# Altium PCB PCB.PcbDoc
Units mil, origin at the board's own origin, x right, y up, seen from the top; angles counter-clockwise.
Board outline 3100 x 3535 mil, 4 copper layers (Signal1, GND1, GND2, Signal2), stack 23.756 mil thick; 77 components, 60 nets, 305 pads, 56 vias.
Unrouted connection lines stored in the file: 225.
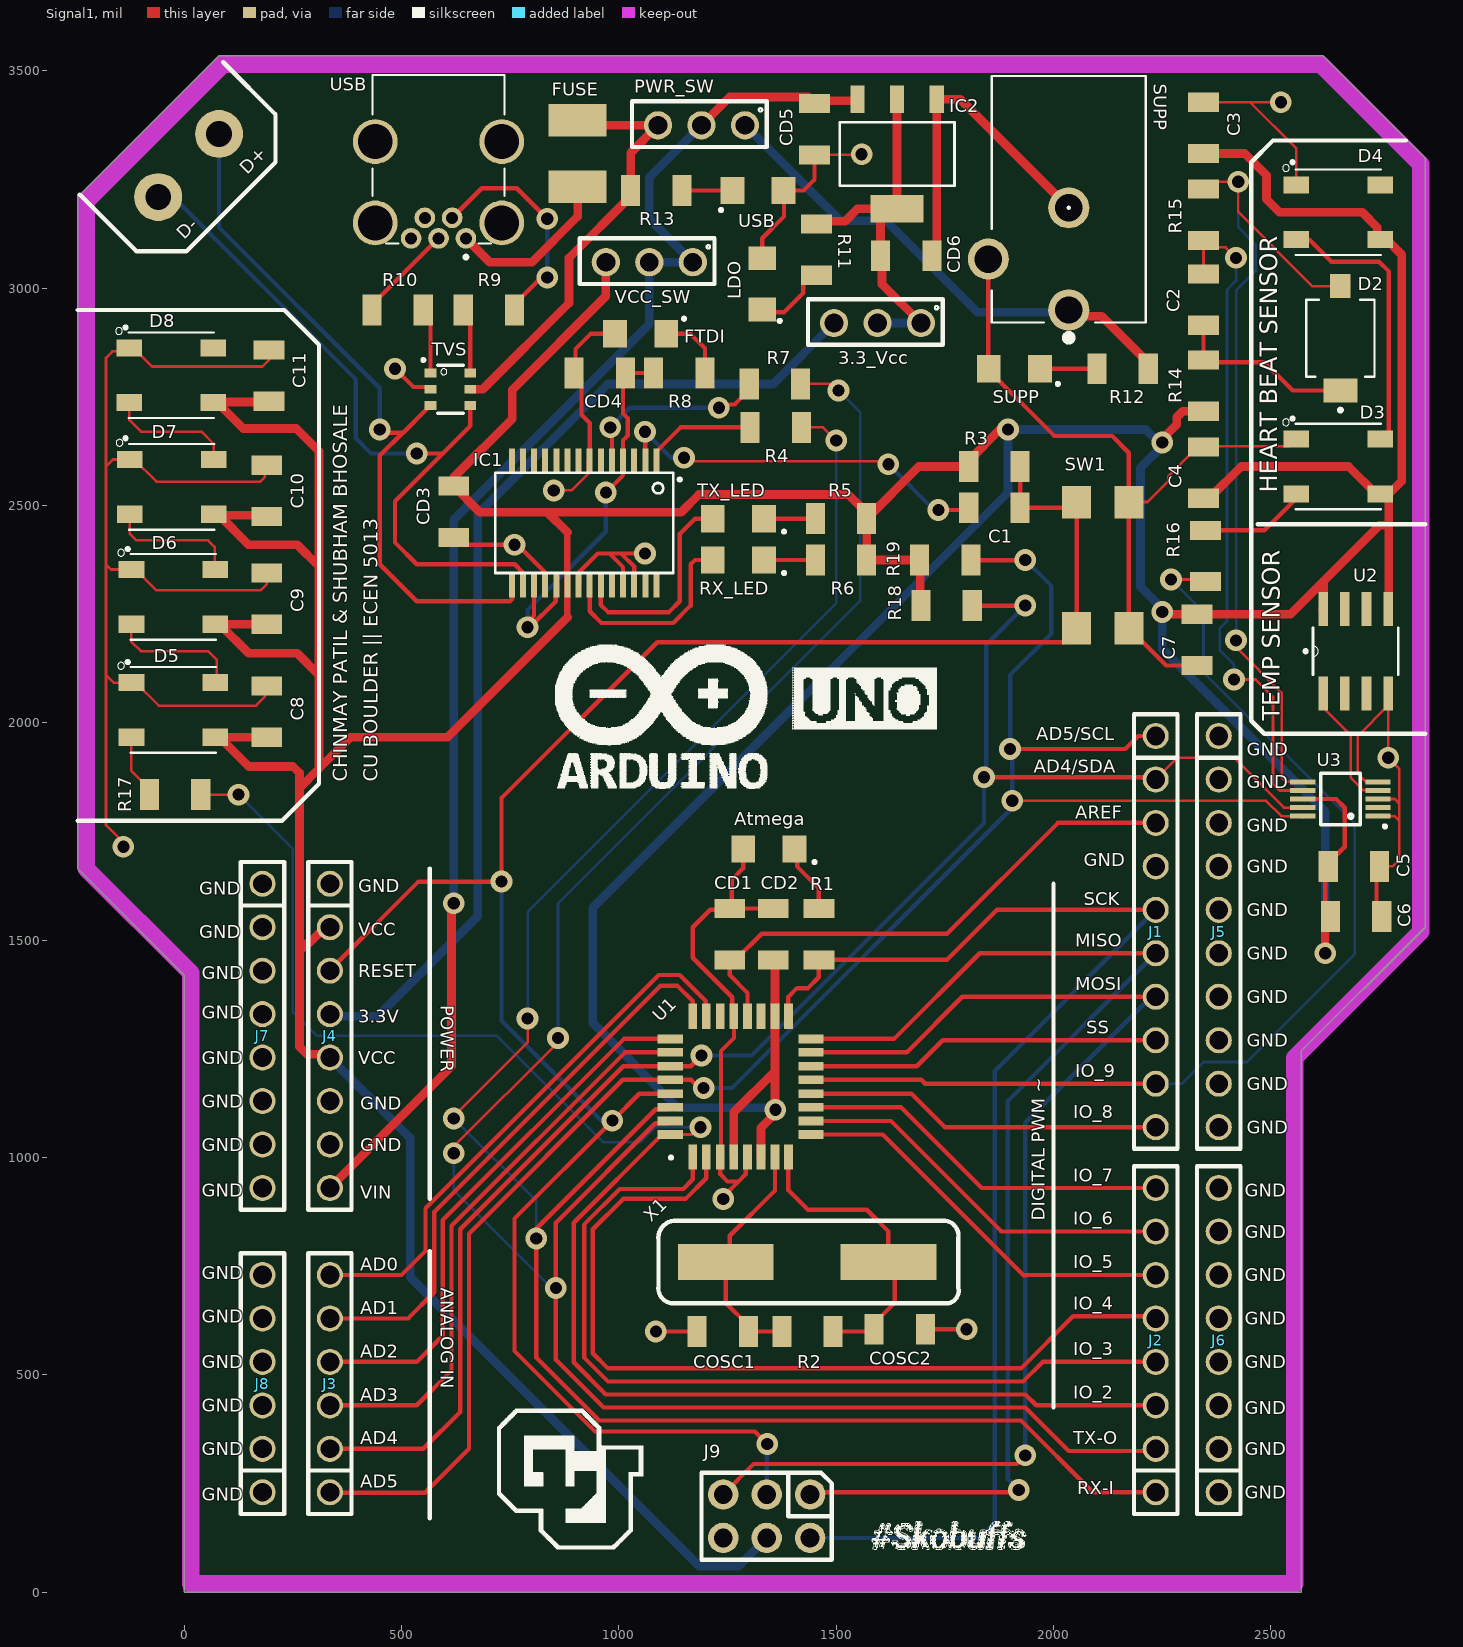
[diagram p0: Signal1 view]
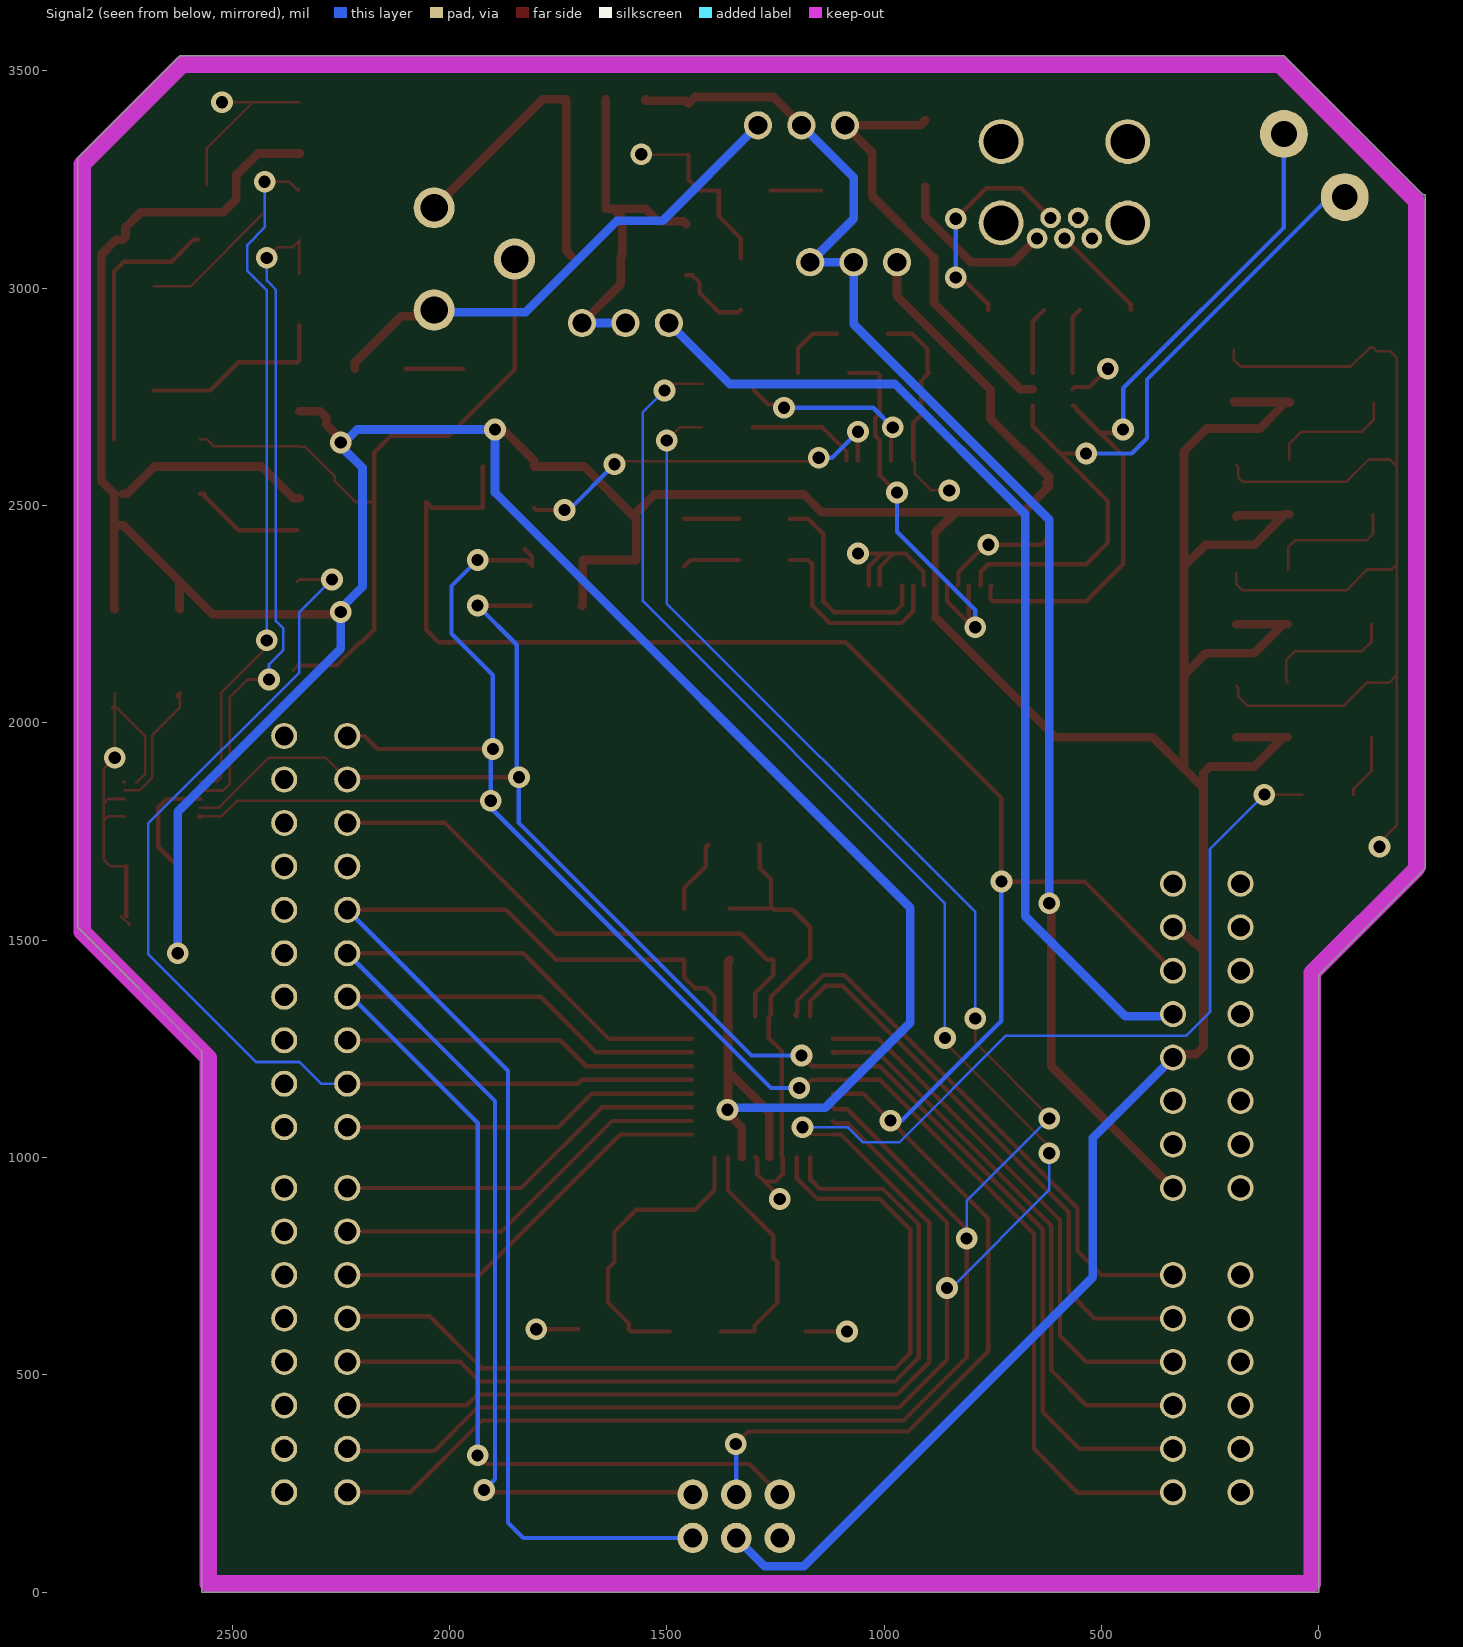
[diagram p1: Signal2 view, seen from below]
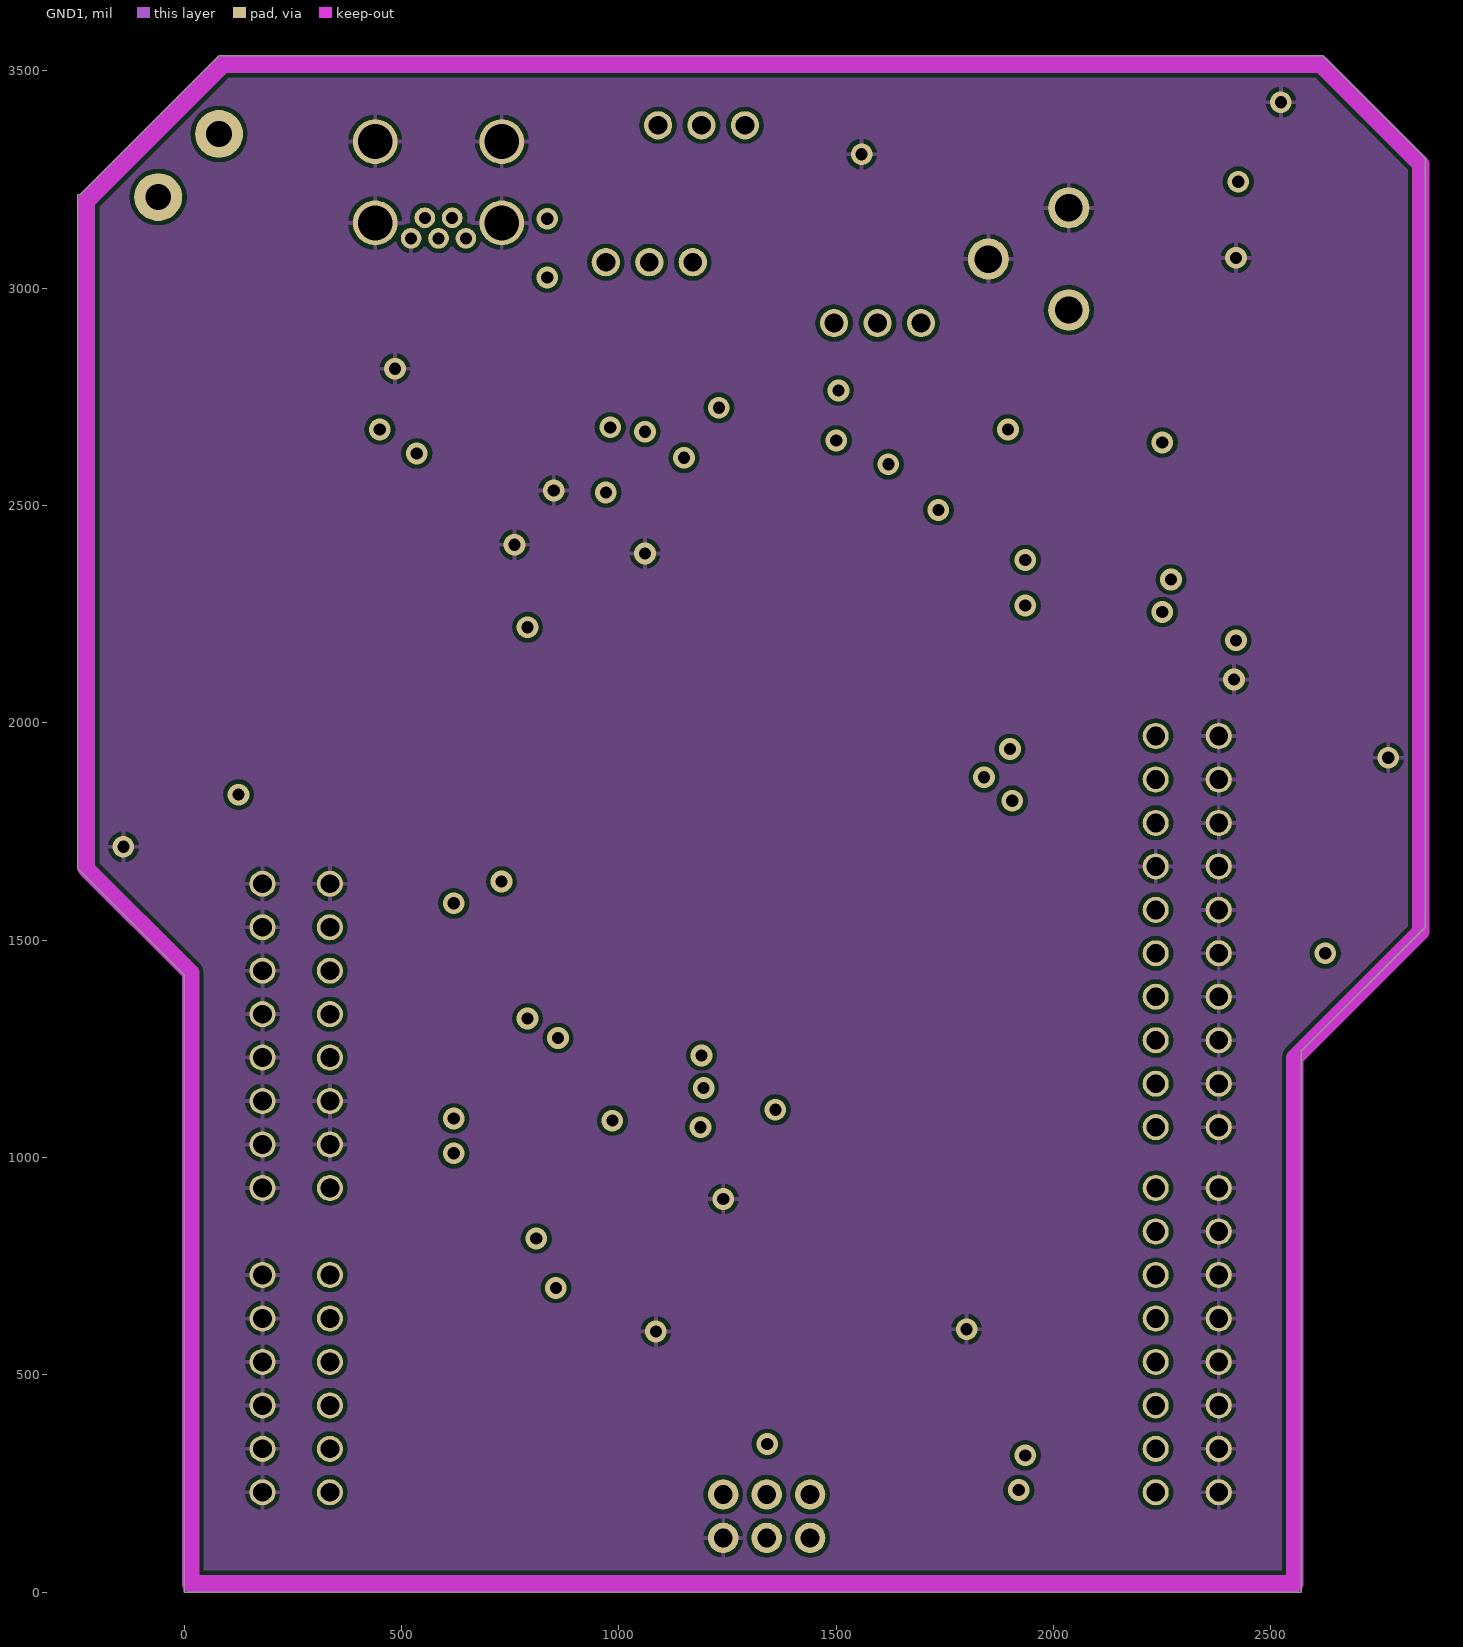
[diagram p2: GND1]
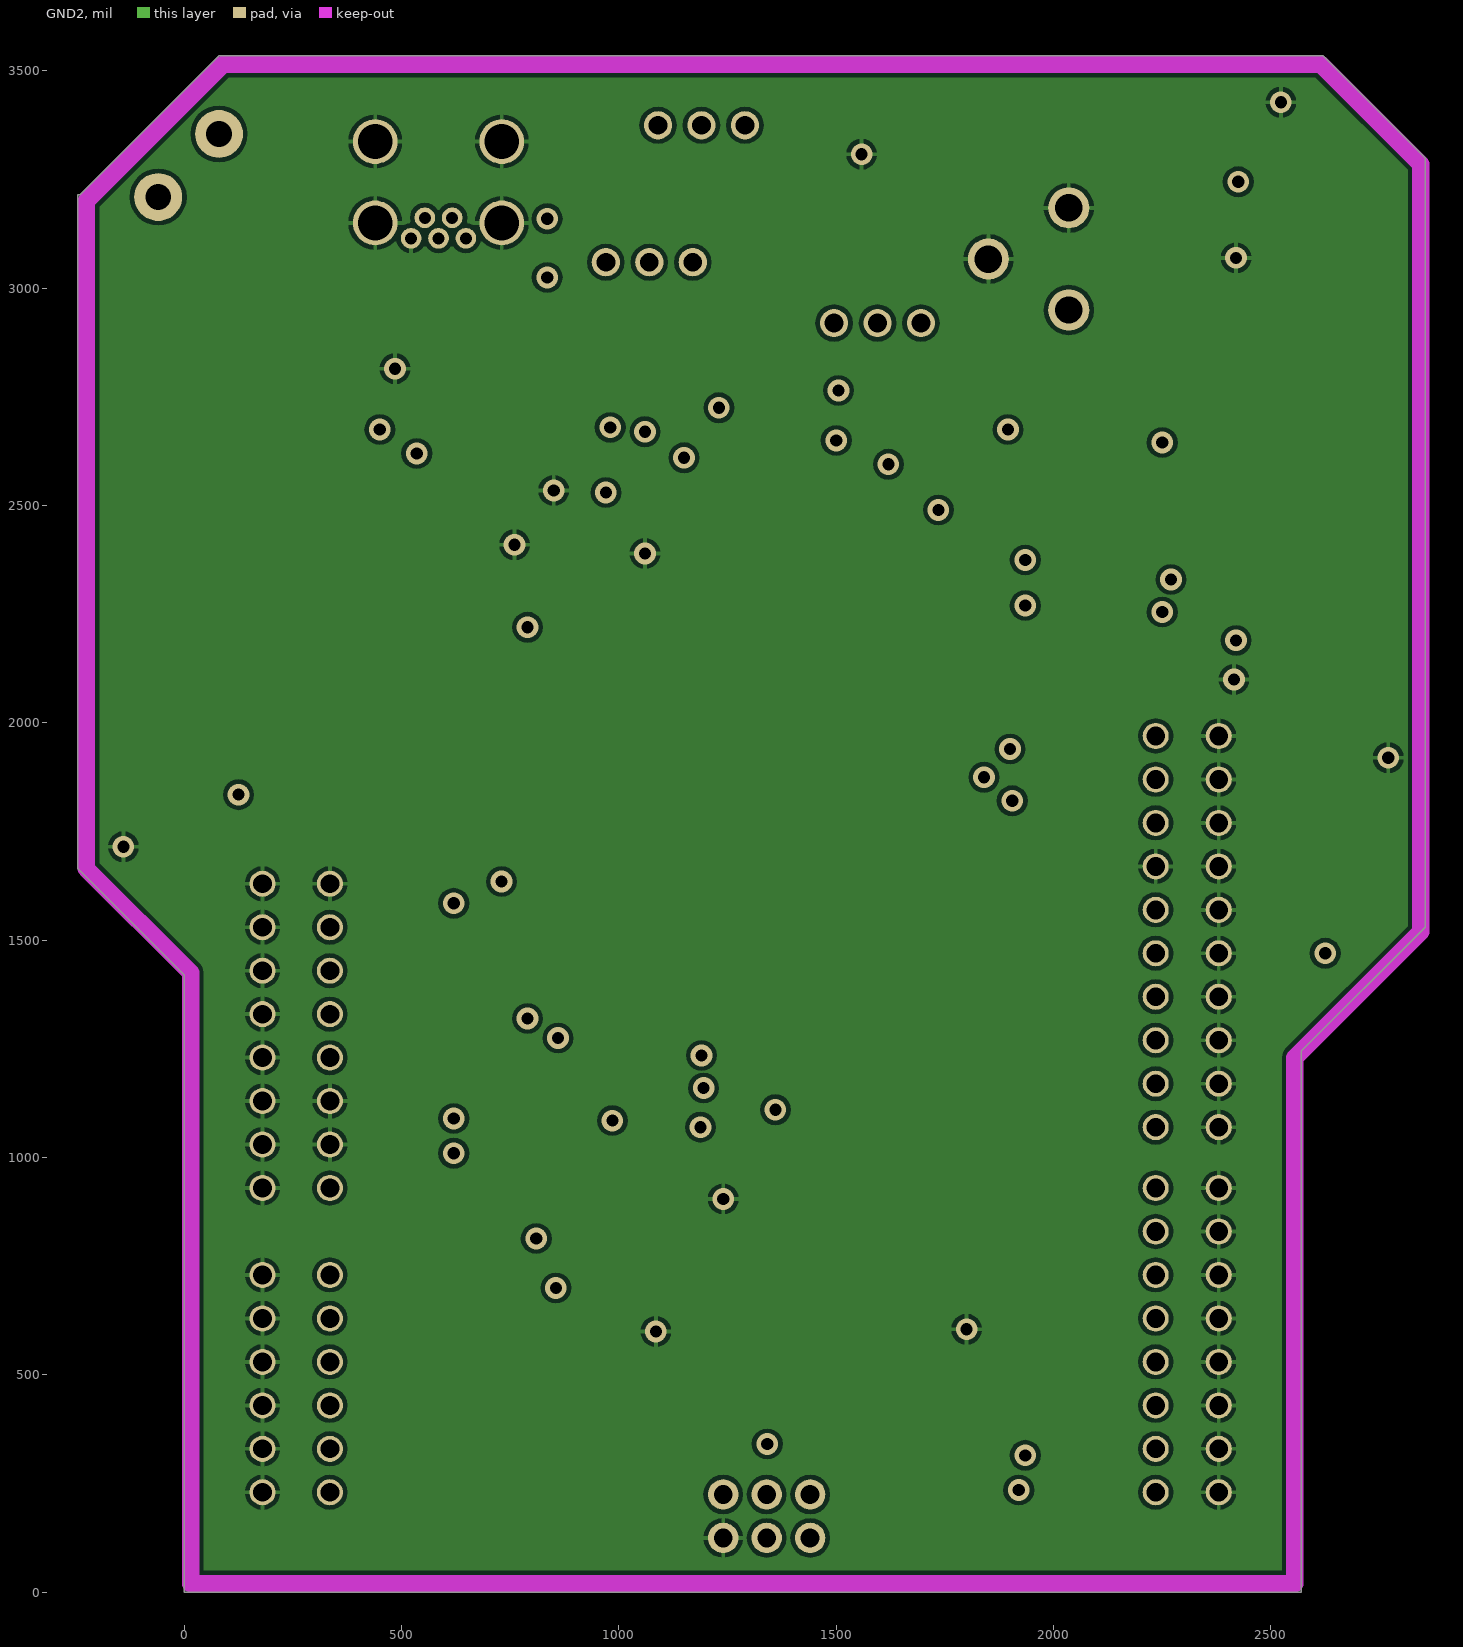
[diagram p3: GND2]

## Layer stack, top to bottom
Top Solder: solder mask 0.4, Solder Resist, Dk 3.5
Signal1: signal copper 1.4
Dielectric 2: prepreg 2.8, PP-006, Dk 4.1
GND1: signal copper 1.3778
Dielectric 1: dielectric 12.6, FR-4, Dk 4.8
GND2: signal copper 1.3778
Dielectric 3: prepreg 2.8, PP-006, Dk 4.1
Signal2: signal copper 1.4
Bottom Solder: solder mask 0.4, Solder Resist, Dk 3.5

## Board outline
0,0 2570,0 2570,1245 2855,1530 2855,3300 2620,3535 80,3535 -240,3215 -245,3215 -245,1665 0,1420

## Design rules (kind name [scope] priority, off if disabled: settings)
Clearance [All] p1: gap=10 ignorepadtopadclearanceinfootprint=FALSE except(0: Arc-Hole Track-Hole SMDPad-Hole THPad-Hole Via-Hole Fill-Hole Poly-Hole Region-Hole Text-Hole)
PolygonConnect [All] p1: connectstyle=Relief reliefconductorwidth=10 reliefentries=4 polygonreliefangle="90 Angle" airgapwidth=10
RoutingVias [All] p1: holewidth=28 width=50 viastyle="Through Hole" minholewidth=28 minwidth=50 maxholewidth=28 maxwidth=50
SilkToSilkClearance [All] p1: silktosilkclearance=6
SilkToSolderMaskClearance [IsPad] p1: minsilkscreentomaskgap=6 clearancetoexposedcopper=TRUE
SolderMaskExpansion [All] p1: expansion=4
Width "Schematic Width Constraint_12" [InNet('Diode_Out_2')] p1: maxlimit=10 minlimit=6 preferedwidth=6
Width "Schematic Width Constraint_11" [InNet('AD5/SCL')] p2: maxlimit=10 minlimit=6 preferedwidth=6
Width "Schematic Width Constraint_10" [InNet('AD4/SDA')] p3: maxlimit=10 minlimit=6 preferedwidth=6
Width "Schematic Width Constraint_8" [InNet('Diode_Out_1')] p4: maxlimit=10 minlimit=6 preferedwidth=6
Width "Schematic Width Constraint_7" [InNet('Temp_Vout_1')] p5: maxlimit=6 minlimit=6 preferedwidth=6
Width "Schematic Width Constraint_6" [InNet('VCC')] p6: maxlimit=20 minlimit=10 preferedwidth=20
Width "Schematic Width Constraint_5" [InNet('3.3V_VCC')] p7: maxlimit=20 minlimit=10 preferedwidth=20
Width "Schematic Width Constraint_4" [InNet('3.3V')] p8: maxlimit=20 minlimit=10 preferedwidth=20
Width "Schematic Width Constraint_3" [InNet('SUPP')] p9: maxlimit=20 minlimit=10 preferedwidth=20
Width "Schematic Width Constraint_2" [InNet('VIN')] p10: maxlimit=20 minlimit=10 preferedwidth=20
Width "Schematic Width Constraint_1" [InNet('USB_VCC')] p11: maxlimit=20 minlimit=10 preferedwidth=20
Width "Schematic Width Constraint" [InNet('USB_SUPP')] p12: maxlimit=20 minlimit=10 preferedwidth=20
Width [All] p13: maxlimit=20 minlimit=6 preferedwidth=6
28 further rules are at their usual default settings.

## Classes and differential pairs
component class Sensors: C2 C3 C4 C5 C6 C7 C8 C9 C10 C11 D2 D3 D4 D5 D6 D7 D8 R14 R15 R16 R17 U2 U3
component class PowerSupply: 3.3_Vcc CD5 CD6 FUSE IC2 LDO PWR_SW R9 R10 R11 R12 R13 SUPP TVS USB VCC_SW
component class FTDIChip: C1 CD3 CD4 D+ D- FTDI IC1 R4 R5 R6 R7 R8 RX_LED TX_LED
component class Atmega328: Atmega CD1 CD2 COSC1 COSC2 J1 J2 J3 J4 J5 J6 J7 J8 J9 R1 R2 R3 R18 R19 SW1 U1 X1

## Components (designator, comment, footprint, x,y, rotation, side; value= is the part's Value field where it differs from the comment)
3.3_Vcc "PREC003SAAN-RC" 3_PIN 1695,2919.95 r180 top value="CONN HEADER VERT 3POS 2.54MM" (schematic designator 3)
Atmega "LTST-C150CKT" LED 1345,1710 r90 top value="LED RED CLEAR 1206 SMD" (schematic designator D1)
C1 "CL31A226MOCLNNC" 1206_Passive 1804,2495 r0 top value="CAP CER 22UF 16V X5R 1206"
C2 "CL31A226MOCLNNC" 1206_Passive 2345,2914 r90 top value="CAP CER 22UF 16V X5R 1206"
C3 "CL31A226MOCLNNC" 1206_Passive 2345,3429 r270 top value="CAP CER 22UF 16V X5R 1206"
C4 "CL31A226MOCLNNC" 1206_Passive 2345,2636 r270 top value="CAP CER 22UF 16V X5R 1206"
C5 "CL31A226MOCLNNC" 1206_Passive 2751,1670 r180 top value="CAP CER 22UF 16V X5R 1206"
C6 "CL31A226MOCLNNC" 1206_Passive 2756,1555 r180 top value="CAP CER 22UF 16V X5R 1206"
C7 "CL31A226MOCLNNC" 1206_Passive 2330,2131 r90 top value="CAP CER 22UF 16V X5R 1206"
C8 "CL31A226MOCLNNC" 1206_Passive 190,2086 r270 top value="CAP CER 22UF 16V X5R 1206"
C9 "CL31A226MOCLNNC" 1206_Passive 190,2346 r270 top value="CAP CER 22UF 16V X5R 1206"
C10 "CL31A226MOCLNNC" 1206_Passive 190,2594 r270 top value="CAP CER 22UF 16V X5R 1206"
C11 "CL31A226MOCLNNC" 1206_Passive 195,2859 r270 top value="CAP CER 22UF 16V X5R 1206"
CD1 "22uF" 1206_Passive 1255,1574 r270 top value="CAP CER 22UF 16V X5R 1206"
CD2 "22uF" 1206_Passive 1355,1454 r90 top value="CAP CER 22UF 16V X5R 1206"
CD3 "22uF" 1206_Passive 620,2546 r270 top value="CAP CER 22UF 16V X5R 1206"
CD4 "22uF" 1206_Passive 1016,2805 r180 top value="CAP CER 22UF 16V X5R 1206"
CD5 "22uF" 1206_Passive 1450,3426 r270 top value="CAP CER 22UF 16V X5R 1206"
CD6 "22uF" 1206_Passive 1601,3075 r0 top value="CAP CER 22UF 16V X5R 1206"
COSC1 "22pF" 1206_Passive 1179,600 r0 top value="CAP CER 22PF 16V C0G/NP0 1206"
COSC2 "22pF" 1206_Passive 1706,605 r180 top value="CAP CER 22PF 16V C0G/NP0 1206"
D2 "SFH_2430-Z" *DIO_SFH_2430-Z_SFH_2430-Z(Primary) 2660,2885 r90 top
D3 "IN-PI554FCH" *LED_IN-PI554FCH 2655,2590 r0 top
D4 "IN-PI554FCH" *LED_IN-PI554FCH 2655,3175 r0 top
D5 "IN-PI554FCH" *LED_IN-PI554FCH -25,2030 r0 top
D6 "IN-PI554FCH" *LED_IN-PI554FCH -25,2290 r0 top
D7 "IN-PI554FCH" *LED_IN-PI554FCH -28.54,2542.99 r0 top
D8 "IN-PI554FCH" *LED_IN-PI554FCH -30,2800 r0 top
D+ "TESTPOINT" TestPoint 80,3355 r0 top
D- "TESTPOINT" TestPoint -60,3210 r0 top
FTDI "LTST-C150CKT" LED 1050,2895 r90 top value="LED RED CLEAR 1206 SMD" (schematic designator FTDI1)
FUSE "MF-MSMF050-2" FUSE 895,3385 r270 top value="PTC RESET FUSE 15V 500MA 1812" (schematic designator FUSE1)
IC1 "FT232RL-REEL" FTDI 910,2450 r270 top value="IC USB FS SERIAL UART 28-SSOP"
IC2 "AZ1117CH-3.3TRG1" LDO 1640,3310 r0 top value="IC REG LINEAR 3.3V 800MA SOT223"
J1 "PPTC101LFBN-RC" 10_PIN 2235,1067.24 r90 top value="CONN HDR 10POS 0.1 TIN PCB"
J2 "PPTC081LFBN-RC" 8_PIN 2235,930 r270 top value="CONN HDR 8POS 0.1 TIN PCB"
J3 "PPTC061LFBN-RC" 6_PIN 335,232.37 r90 top value="CONN HDR 6POS 0.1 TIN PCB"
J4 "PPTC081LFBN-RC" 8_PIN 335,930 r90 top value="CONN HDR 8POS 0.1 TIN PCB"
J5 "PPTC101LFBN-RC" 10_PIN 2380,1067.24 r90 top value="CONN HDR 10POS 0.1 TIN PCB"
J6 "PPTC081LFBN-RC" 8_PIN 2380,930 r270 top value="CONN HDR 8POS 0.1 TIN PCB"
J7 "PPTC081LFBN-RC" 8_PIN 180,930 r90 top value="CONN HDR 8POS 0.1 TIN PCB"
J8 "PPTC061LFBN-RC" 6_PIN 180,232.37 r90 top value="CONN HDR 6POS 0.1 TIN PCB"
J9 "ICSP" ICSP 1440,225 r270 top value=NRPN032PAEN-RC
LDO "LTST-C150CKT" LED 1330,3010 r0 top value="LED RED CLEAR 1206 SMD" (schematic designator 1)
PWR_SW "PREC003SAAN-RC" 3_PIN 1290,3374.95 r180 top value="CONN HEADER VERT 3POS 2.54MM" (schematic designator PWR_SW1)
R1 "RNCP1206FTD1K00" 1206_Passive 1460,1574 r270 top value="RES 1K OHM 1% 1/2W 1206"
R2 "1M" 1206_Passive 1494,600 r180 top value="RES 1M OHM 5% 1/4W 1206"
R3 "RNCP1206FTD1K00" 1206_Passive 1804,2590 r0 top value="RES 1K OHM 1% 1/2W 1206"
R4 "RNCP1206FTD1K00" 1206_Passive 1301,2680 r0 top value="RES 1K OHM 1% 1/2W 1206"
R5 "RNCP1206FTD1K00" 1206_Passive 1571,2470 r180 top value="RES 1K OHM 1% 1/2W 1206"
R6 "RNCP1206FTD1K00" 1206_Passive 1571,2375 r180 top value="RES 1K OHM 1% 1/2W 1206"
R7 "RNCP1206FTD1K00" 1206_Passive 1299,2780 r0 top value="RES 1K OHM 1% 1/2W 1206"
R8 "RNCP1206FTD1K00" 1206_Passive 1079,2805 r0 top value="RES 1K OHM 1% 1/2W 1206"
R9 "RMCF1206JT300R‎" 1206_Passive 761,2950 r180 top value=300Ohm
R10 "RMCF1206JT300R‎" 1206_Passive 551,2950 r180 top value=300Ohm
R11 "RNCP1206FTD1K00" 1206_Passive 1455,3029 r90 top value="RES 1K OHM 1% 1/2W 1206"
R12 "RNCP1206FTD1K00" 1206_Passive 2219,2815 r180 top value="RES 1K OHM 1% 1/2W 1206"
R13 "RNCP1206FTD1K00" 1206_Passive 1026,3225 r0 top value="RES 1K OHM 1% 1/2W 1206"
R14 "RNCP1206FTD1K00" 1206_Passive 2345,2836 r270 top value="RES 1K OHM 1% 1/2W 1206"
R15 "RMCF1206JT1M00" 1206_Passive 2345,3229 r270 top value="RES 1M OHM 5% 1/4W 1206"
R16 "RNCP1206FTD1K00" 1206_Passive 2350,2324 r90 top value="RES 1K OHM 1% 1/2W 1206"
R17 "RNCP1206FTD1K00" 1206_Passive -81,1835 r0 top value="RES 1K OHM 1% 1/2W 1206"
R18 "RNCP1206FTD1K00" 1206_Passive 1814,2270 r180 top value="RES 1K OHM 1% 1/2W 1206"
R19 "RNCP1206FTD1K00" 1206_Passive 1811,2375 r180 top value="RES 1K OHM 1% 1/2W 1206"
RX_LED "LTST-C150CKT" LED 1275,2375 r90 top value="LED RED CLEAR 1206 SMD" (schematic designator RX_LED1)
SUPP "Power Jack" Power_Jack 2035,2950 r90 top value="CONN PWR JACK 2X5.5MM SOLDER" (schematic designator SUPP1)
SUPP "LTST-C150CKT" LED 1910,2815 r90 top value="LED RED CLEAR 1206 SMD" (schematic designator 2)
SW1 "RESET SWITCH" Switch 2115,2365 r0 top value="SWITCH TACTILE SPST-NO 50MA 12V"
TVS "IP4234CZ6,125" TVS 610,2765 r90 top value="TVS DIODE 5.5V 6TSOP" (schematic designator TVS1)
TX_LED "LTST-C150CKT" LED 1275,2470 r90 top value="LED RED CLEAR 1206 SMD" (schematic designator TX_LED1)
U1 "ATMEGA328P-ANR" ATMega328P 1280,1165 r270 top value="IC MCU 8BIT 32KB FLASH 32TQFP"
U2 "TMP36GSZ" *SOIC127P600X175-8N 2695,2165 r90 top
U3 "ADS1115IDGSR" *SOP50P490X110-10N 2660,1825 r180 top
USB "LTST-C150CKT" LED 1320,3225 r270 top value="LED RED CLEAR 1206 SMD" (schematic designator USB_SUPP1)
USB "XM7D-0512" USB 730.67,3342.44 r270 top value="CONN RCPT USB2.0 MINI B 5P R/A" (schematic designator USB1)
VCC_SW "PREC003SAAN-RC" 3_PIN 1170,3059.95 r180 top value="CONN HEADER VERT 3POS 2.54MM" (schematic designator VCC_SW1)
X1 "ABLS-16.000MHZ-B4-T" Crystal 1245.98,760 r0 top value="CRYSTAL 16.0000MHZ 18PF SMD"

## Footprints (in the part's own frame and the unit in brackets; to place one, negate y for a bottom-side part, rotate by r counter-clockwise, add the part's x,y. Pads: shape width x height; smd on the part's side, far side on the other; paste and mask are expansions set on the pad)
3_PIN [mm]
  round 1.65 hole 1.1: 1(0,-0.001) 2(2.54,-0.001) 3(5.08,-0.001)
  silkscreen extent -1.27,-1.4 6.6,1.27
6_PIN [mil]
  round 60 hole 43.31: 1(-2.37,0) 2(97.63,0) 3(197.63,0) 4(297.63,0) 5(397.63,0) 6(497.63,0)
  silkscreen extent -52,-50 548,50
8_PIN [mil]
  round 60 hole 43.31: 1(700,0) 2(600,0) 3(500,0) 4(400,0) 5(300,0) 6(200,0) 7(100,0) 8(0,0)
  silkscreen extent -50,-50 750,50
10_PIN [mil]
  round 60 hole 43.31: 1(902.76,0) 2(802.76,0) 3(702.76,0) 4(602.76,0) 5(502.76,0) 6(402.76,0) 7(302.76,0) 8(202.76,0) 9(102.76,0) 10(2.76,0)
  silkscreen extent -47,-50 953,50
1206_Passive [mil]
  rect 44x71 smd: 1(1,0) 2(119,0)
*DIO_SFH_2430-Z_SFH_2430-Z(Primary) [mm]
  rect 1.4x1.2 smd: A(3.05,0)
  rect 1.4x2 smd: C(-3.05,0)
  silkscreen extent -4.3,-2 2.25,2
*LED_IN-PI554FCH [mm]
  rect 1.5x1 smd: 1(-2.45,1.6) 2(-2.45,-1.6) 3(2.45,-1.6) 4(2.45,1.6)
  silkscreen extent -3.25,-2.5 2.5,2.78
*SOIC127P600X175-8N [mil]
  rect 78x22 smd: 1(-97,75) 2(-97,25) 3(-97,-25) 4(-97,-75) 5(97,-75) 6(97,-25) 7(97,25) 8(97,75)
  silkscreen extent -54,-98 54,98
*SOP50P490X110-10N [mm]
  rect 1.45x0.3 smd: 1(-2.2,1)
  rect 1.47x0.3 smd: 2(-2.2,0.5) 3(-2.2,0) 4(-2.2,-0.5) 5(-2.2,-1) 6(2.2,-1) 7(2.2,-0.5) 8(2.2,0) 9(2.2,0.5) 10(2.2,1)
  silkscreen extent -2.68,-1.5 1.15,1.68
ATMega328P [mil]
  rect 58x20 smd: 1(163.93,-110) 2(163.93,-79) 3(163.93,-47) 4(163.93,-16) 5(163.93,16) 6(163.93,47) 7(163.93,79) 8(163.93,110) 17(-160.07,110) 18(-160.07,79) 19(-160.07,47) 20(-160.07,16) 21(-160.07,-16) 22(-160.07,-47) 23(-160.07,-79) 24(-160.07,-110)
  rect 20x58 smd: 9(111.93,162) 10(80.93,162) 11(48.93,162) 12(17.93,162) 13(-14.07,162) 14(-45.07,162) 15(-77.07,162) 16(-108.07,162) 25(-108.07,-162) 26(-77.07,-162) 27(-45.07,-162) 28(-14.07,-162) 29(17.93,-162) 30(48.93,-162) 31(80.93,-162) 32(111.93,-162)
Crystal [mm]
  rect 5.6x2.1 smd: 1(0,0) 2(9.5,0)
  silkscreen extent -3.95,-2.41 13.6,2.41
FTDI [mil]
  rect 55x13.7 smd: 1(-153.94,176.34) 2(-153.94,150.75) 3(-153.94,125.16) 4(-153.94,99.57) 5(-153.94,73.98) 6(-153.94,48.39) 7(-153.94,22.8) 8(-153.94,-2.8) 9(-153.94,-28.39) 10(-153.94,-53.98) 11(-153.94,-79.57) 12(-153.94,-105.16) 13(-153.94,-130.75) 14(-153.94,-156.34) 15(133.94,-156.34) 16(133.94,-130.75) 17(133.94,-105.16) 18(133.94,-79.57) 19(133.94,-53.98) 20(133.94,-28.39) 21(133.94,-2.8) 22(133.94,22.8) 23(133.94,48.39) 24(133.94,73.98) 25(133.94,99.57) 26(133.94,125.16) 27(133.94,150.75) 28(133.94,176.34)
  silkscreen extent -125,-195 105,215
FUSE [mm]
  rect 1.9x3.4 smd: 1(3.855,0.254) 2(-0.045,0.254)
ICSP [mil]
  round 70 hole 43.31: 1(0,0) 2(100,0) 3(0,-100) 4(100,-100) 5(0,-200) 6(100,-200)
  silkscreen extent -50,-250 150,50
LDO [mil]
  rect 33x63 smd: 1(91,124.94) 2(0,124.94) 3(-91,124.94)
  rect 122x63 smd: 4(0,-127.06)
  silkscreen extent -132,-74 132,72
LED [mil]
  rect 63x55 smd: 1(0,59) 2(0,-59)
Power_Jack [mm]
  round 2.4 hole 1.6: 1(0,0) 2(5.969,0) 3(2.977,4.7)
  silkscreen extent -1.82,-4.5 13.68,4.5
Switch [mm]
  rect 1.7x1.9 smd: 1(1.479,-3.727) 2(1.479,3.639) 3(-1.569,-3.727) 4(-1.569,3.639)
TestPoint [mm]
  round 2.8 hole 1.5: 1(0,0)
TVS [mm]
  rect 0.508x0.7 smd: 1(1.02,1.105) 2(0.07,1.105) 3(-0.88,1.105) 4(-0.88,-1.219) 5(0.07,-1.219) 6(1.02,-1.219)
  silkscreen extent -1.33,-0.81 1.47,0.69
USB [mm]
  round 1.208 hole 0.7: 1(5.777,-2.1) 2(4.577,-2.9) 3(5.777,-3.7) 4(4.577,-4.5) 5(5.777,-5.3)
  round 2.616 hole 2.032: SH1(0.127,-7.4) SH2(4.877,-7.4) SH3(4.877,0) SH4(0.127,0)
  silkscreen extent -3.77,-7.55 6.98,0.15

## Part data
3.3_Vcc PWR_SW VCC_SW: library part 3_PIN, "Connector Header Through Hole 3 position 0.100\" (2.54mm)", Digikey Link=https://www.digikey.com/product-detail/en/PREC003SAAN-RC/S1012EC-03-ND/2774851/?itemSeq=304982371, Digikey Part=S1012EC-03-ND
Atmega FTDI LDO RX_LED SUPP TX_LED USB: library part 1206_RED_LED, "Red 638nm LED Indication - Discrete 1.8V 1206 (3216 Metric)", Digikey Link=https://www.digikey.com/product-detail/en/LTST-C150CKT/160-1167-1-ND/269239/?itemSeq=304982368, Digikey Part=160-1167-1-ND
C1 C2 C3 C4 C5 C6 C7 C8 C9 C10 C11 CD1 CD2 CD3 CD4 CD5 CD6: library part 1206_22uF, "22µF ±20% 16V Ceramic Capacitor X5R 1206 (3216 Metric)", Digikey Link=https://www.digikey.com/product-detail/en/CL31A226MOCLNNC/1276-2728-1-ND/3890814/?itemSeq=304982363, Digikey Part=1276-2728-1-ND
COSC1 COSC2: library part 1206_22pF, "22pF ±5% 16V Ceramic Capacitor C0G, NP0 1206 (3216 Metric)", Digikey Link=https://www.digikey.com/product-detail/en/885012008011/732-7867-1-ND/5454494/?itemSeq=304982362, Digikey Part=732-7867-1-ND
D2: "PHOTODIODE 570NM SMD", Package="SMD-2 Osram Opto", Availability=Unavailable, MF="OSRAM Opto", MP="SFH 2430-Z", Price=None, SnapEDA_Link=https://www.snapeda.com/parts/SFH%202430-Z/OSRAM%20Opto%20Semiconductors%20Inc./view-part/?ref=snap
D3 D4 D5 D6 D7 D8: "5050RGB with integrated IC built in 4 PIN Viewing angle: 120 degrees", Package="SMD-4 Innolux", Availability=Unavailable, MF=Inolux, MP=IN-PI554FCH, Price=None, SnapEDA_Link=https://www.snapeda.com/parts/IN-PI554FCH/Inolux/view-part/?ref=snap
FUSE: library part Fuse, "Polymeric PTC Resettable Fuse 15V 500mA Ih Surface Mount 1812 (4532 Metric), Concave", Digikey Link=https://www.digikey.com/product-detail/en/MF-MSMF050-2/MF-MSMF050-2CT-ND/662842/?itemSeq=304982360, Digikey Part=MF-MSMF050-2CT-ND
IC1: library part FTDI, "USB Bridge, USB to UART USB 2.0 UART Interface 28-SSOP", Digikey Link=https://www.digikey.com/product-detail/en/FT232RL-REEL/768-1007-1-ND/1836402/?itemSeq=304982359, Digikey Part=768-1007-1-ND
IC2: library part 3.3V_LDO, "Linear Voltage Regulator IC Positive Fixed 1 Output 1A SOT-223", Digikey Link=https://www.digikey.com/product-detail/en/AZ1117CH-3.3TRG1/AZ1117CH-3.3TRG1DICT-ND/4505206/?itemSeq=304982370, Digikey Part=AZ1117CH-3.3TRG1DICT-ND
J1 J5: library part 10_PIN_FEMALE, "10 Position Header Connector 0.100\" (2.54mm) Through Hole Tin", Digikey Link=https://www.digikey.com/product-detail/en/PPTC101LFBN-RC/S7008-ND/810149/?itemSeq=304982352, Digikey Part=S7008-ND
J2 J4 J6 J7: library part 8_PIN_FEMALE, "8 Position Header Connector 0.100\" (2.54mm) Through Hole Tin", Digikey Link=https://www.digikey.com/product-detail/en/PPTC081LFBN-RC/S7006-ND/810147/?itemSeq=304982354, Digikey Part=S7006-ND
J3 J8: library part 6_PIN_FEMALE, "6 Position Header Connector 0.100\" (2.54mm) Through Hole Tin", Digikey Link=https://www.digikey.com/product-detail/en/PPTC061LFBN-RC/S7004-ND/810145/?itemSeq=304982353, Digikey Part=S7004-ND
J9: "Connector Header Through Hole 6 position 0.079\" (2.00mm)", Digikey Link=https://www.digikey.com/product-detail/en/NRPN032PAEN-RC/S5801-03-ND/804955/?itemSeq=304982355, Digikey Part=S5801-03-ND
R1 R3 R4 R5 R6 R7 R8 R11 R12 R13 R14 R16 R17 R18 R19: library part 1206_1K, "1 kOhms ±1% 0.5W, 1/2W Chip Resistor 1206 (3216 Metric) Anti-Sulfur, Moisture Resistant Thin Film", Digikey Link=https://www.digikey.com/product-detail/en/RNCP1206FTD1K00/RNCP1206FTD1K00CT-ND/2240675/?itemSeq=304982373, Digikey Part=RNCP1206FTD1K00CT-ND
R2 R15: library part 1206_1M, "1 MOhms ±5% 0.25W, 1/4W Chip Resistor 1206 (3216 Metric) Automotive AEC-Q200 Thick Film", Digikey Link=https://www.digikey.com/product-detail/en/RMCF1206JT1M00/RMCF1206JT1M00CT-ND/1942830/?itemSeq=304982358, Digikey Part="Number RMCF1206JT1M00CT-ND"
R9 R10: library part 1206_300Ohm, "300 Ohms ±5% 0.25W, 1/4W Chip Resistor 1206 (3216 Metric) Automotive AEC-Q200 Thick Film", Digikey Link=https://www.digikey.com/product-detail/en/RMCF1206JT300R/RMCF1206JT300RCT-ND/1942776/?itemSeq=304982374, Digikey Part=RMCF1206JT300RCT-ND
SUPP: "Power Barrel Connector Jack 2.10mm ID (0.083\"), 5.50mm OD (0.217\") Through Hole, Right Angle", Digikey Link=https://www.digikey.com/product-detail/en/PJ-102A/CP-102A-ND/275425/?itemSeq=304982367, Digikey Part=CP-102A-ND
SW1: library part Push_Button, "Tactile Switch SPST-NO Top Actuated Surface Mount", Digikey Link=https://www.digikey.com/product-detail/en/TL3305AF160QG/EG5350CT-ND/5816195/?itemSeq=304982361, Digikey Part=EG5350CT-ND
TVS: library part TVS_Diode, "Clamp Ipp Tvs Diode Surface Mount 6-TSOP", Digikey Link=https://www.digikey.com/product-detail/en/IP4234CZ6%2c125/1727-4717-1-ND/2531156/?itemSeq=304982369, Digikey Part=1727-4717-1-ND
U1: library part ATMega328P, "AVR AVR® ATmega Microcontroller IC 8-Bit 20MHz 32KB (16K x 16) FLASH 32-TQFP (7x7)", Digikey Link=https://www.digikey.com/product-detail/en/ATMEGA328P-ANR/ATMEGA328P-ANRCT-ND/2774230/?itemSeq=304982365, Digikey Part=ATMEGA328P-ANRCT-ND
U2: "Temp Sensor Analog_Voltage_ Serial _2-Wire_ 8-Pin SOIC N Tube", Package="SOIC-8 Analog Devices", Availability=Unavailable, MF="Analog Devices", MP=TMP36GSZ, Price=None, SnapEDA_Link=https://www.snapeda.com/parts/TMP36GSZ/Analog%20Devices%20Inc./view-part/?ref=snap
U3: "16-Bit ADC with Integrated MUX, PGA, Comparator, Oscillator, and Reference 10-VSSOP -40 to 125", Package="MSOP-10 Texas Instruments", Digi-Key_Part_Number=296-38849-1-ND, Digi-Key_Purchase_URL=https://www.digikey.com/product-detail/en/texas-instruments/ADS1115IDGSR/296-38849-1-ND/5142969?utm_source=snapeda&utm_medium=aggregator&utm_campaign=symbol, MF="Texas Instruments", MP=ADS1115IDGSR, SnapEDA_Link=https://www.snapeda.com/parts/ADS1115IDGSR/Texas%20Instruments/view-part/?ref=snap
USB: library part USB, "USB - mini B USB 2.0 Receptacle Connector 5 Position Through Hole, Right Angle", Digikey Link=https://www.digikey.com/product-detail/en/XM7D-0512/OR1205-ND/4695531/?itemSeq=304982356, Digikey Part=OR1205-ND
X1: library part 16MHz_Crystal, "16MHz ±30ppm Crystal 18pF 40 Ohms HC-49/US", Digikey Link=https://www.digikey.com/product-detail/en/ABLS-16.000MHZ-B4-T/535-10226-1-ND/2184261/?itemSeq=304982364, Digikey Part=535-10226-1-ND

## Via types
v1: diameter 50, hole 28, Signal1 to Signal2, 56 vias

## Nets (pads, with @x,y where several pads share a name; then routed paths per layer and width w, separated by ;. In a path a pad name is that pad's centre, name@x,y a point inside that pad or via, vN(x,y) a via of type N, cw(c..) or ccw(c..) an arc to the next point about the centre after c; other vN are vias at no path point)
3.3V: 3.3_Vcc.1 3.3_Vcc.2 CD6.1 IC2.2 IC2.4 R11.2 | length 866.8
  Signal1 w20: R11.2 1461.44,3154.44 1520.5,3154.44 1549,3182.94 IC2.4@1623.5,3182.94 ; 3.3_Vcc.2 3.3_Vcc.2@1598.5,2923.5 ; IC2.2 IC2.4 IC2.4@1623.5,3182.94 ; 3.3_Vcc.1 1605.5,3009.5 1605.5,3071.5 CD6.1 1602,3161.44 IC2.4@1623.5,3182.94
  Signal2 w20: 3.3_Vcc.2 3.3_Vcc.1
3.3V_VCC: 3.3_Vcc.3 J4.4 | length 2364.6
  Signal2 w20: J4.4 340,1325 445,1325 675,1555 675,2480 975,2780 1355,2780 3.3_Vcc.3
3V3OUT: CD4.1 IC1.4 IC1.17 IC1.19 R8.1 | length 980.4
  Signal1 w10: IC1.17 804.84,2246.75 790,2231.91 v1(790,2220) 795,2220 855,2280 855,2315.04 IC1.19 ; v1(970,2530) 1009.57,2569.57 IC1.4 1009.57,2650.05 1020,2660.48 1020,2701.57 1009.57,2712 1009.57,2799.57 CD4.1 R8.1
  Signal2 w10: v1(790,2220) 790,2260 970,2440 v1(970,2530)
AD0: J3.6 U1.23 | length 1271.9
  Signal1 w10: J3.6 500,730 555,785 555,883.28 1091.72,1420 1140,1420 1200,1360 1200,1334.07 1205,1329.07 U1.23
AD1: J3.5 U1.24 | length 1309.7
  Signal1 w10: J3.5 515,630 575,690 575,875 1095,1395 1135,1395 1170,1360 U1.24
AD2: J3.4 U1.25 | length 1246.7
  Signal1 w10: J3.4 535,530 595,590 595,856.14 1011.93,1273.07 U1.25
AD3: J3.3 U1.26 | length 1318.4
  Signal1 w10: J3.3 535,430 615,510 615,843.28 1013.79,1242.07 1113.86,1242.07 1115.93,1240 U1.26 U1.26@1116.54,1243.54
AD4/SDA: J1.2 J3.2 R18.1 U1.27 U3.9 | length 3812.5
  Signal1 w6: J1.2 2285,1920 2415,1920 2529.68,1805.32 U3.9
  Signal1 w10: J3.2 550,330 635,415 635,835 1010.07,1210.07 U1.27 1165.07,1210.07 v1(1190,1235) ; R18.1 v1(1935,2270) ; v1(1840,1875) 2230,1875 J1.2
  Signal2 w10: v1(1190,1235) 1305,1235 1840,1770 v1(1840,1875) 1845,1880 1845,2180 v1(1935,2270)
AD5/SCL: J1.1 J3.1 R19.1 U1.28 U3.10 | length 4374.9
  Signal1 w6: v1(1905,1820.86) 2489.14,1820.86 2524.37,1785.63 U3.10
  Signal1 w10: J3.1 335.93,229.07 554.07,229.07 655,330 655,825 1009.07,1179.07 U1.28 1165.93,1179.07 1185.93,1159.07 1194.07,1159.07 v1(1195,1160) ; R19.1@1827,2400 1810,2383 R19.1 1810,2362 1822.07,2374.07 1934.07,2374.07 v1(1935,2375) ; v1(1900,1940) 2165,1940 2195,1970 J1.1 ; U3.10 2574.53,1784.49 2575.31,1784.49 U3.10@2575.82,1785
  Signal2 w6: v1(1900,1940) v1@1905,1935
  Signal2 w10: v1(1195,1160) 1260,1160 1905,1805 v1(1905,1820.86) v1@1905,1935 ; v1(1900,1940) 1900,2110 1995,2205 1995,2315 v1(1935,2375)
AREF: CD1.2 J1.3 U1.20 | length 1257.4
  Signal1 w10: U1.20 1296,1379 1255,1420 CD1.2 1268.5,1455 1328.5,1515 1755,1515 2010,1770 J1.3
D+: D+.1 IC1.15 TVS.3 | length 1687.7
  Signal1 w10: v1(450,2675) 457.27,2667.73 502.73,2667.73 450,2615 450,2365 535,2280 749.14,2280 755,2285.86 755,2314.72 IC1.15 ; 503.85,2667.73 557.7,2721.57 557.7,2725.35 562.7,2730.35 TVS.3
  Signal2 w10: D+.1@80,3365 80,3140 450,2770 v1(450,2675)
D-: D-.1 IC1.16 TVS.4 | length 1714.5
  Signal1 w10: v1(535,2620) 590,2620 ; TVS.4 658.01,2683.01 485,2510 485,2415 535,2365 760.29,2365 777.4,2347.89 777.4,2317.91 IC1.16
  Signal2 w10: D-.1@-55,3225 -40,3225 395,2790 395,2655 430,2620 v1(535,2620)
Diode_Out_1: D2.A R15.1 U3.6 | length 1986.4
  Signal1 w6: R15.1 2348,3225 2368,3245 v1(2425,3245) 2425,3175 2594.92,3005.08 D2.A@2680,3005.08 ; v1(2420,2190) 2420,2174.37 2525,2069.37 2525,1875 2535.45,1864.55 2573.2,1864.55 U3.6
  Signal2 w6: v1(2420,2190) 2420,2995 2465,3040 2465,3100 2425,3140 v1(2425,3245)
Dminus: R9.1 USB.2@616.5,3162.24 | length 524.5
  Signal1 w10: USB.2@616.5,3162.24 684.25,3230 765,3230 v1(835,3160) ; R9.1 760,2963.5 821.5,3025 v1(835,3025)
  Signal2 w10: v1(835,3025) v1(835,3160)
Dplus: R10.2 USB.3 | length 228.4
  Signal1 w10: R10.2 432,2962 USB.3
GND: Atmega.1 C2.2 C3.1 C4.1 C5.1 C6.1 C7.1 C8.1 C9.1 C10.1 C11.1 CD1.1 CD2.2 CD3.2 CD4.2 CD5.2 CD6.2 COSC1.1 COSC2.1 D3.1 D4.1 D5.1 D6.1 D7.1 D8.1 FTDI.1 IC1.7 IC1.18 IC1.21 IC1.25 IC1.26 IC2.1 J1.4 J4.1 J4.6 J4.7 J5.1 J5.2 J5.3 J5.4 J5.5 J5.6 J5.7 J5.8 J5.9 J5.10 J6.1 J6.2 J6.3 J6.4 J6.5 J6.6 J6.7 J6.8 J7.1 J7.2 J7.3 J7.4 J7.5 J7.6 J7.7 J7.8 J8.1 J8.2 J8.3 J8.4 J8.5 J8.6 J9.6 LDO.1 R15.2 SUPP.1@1851,2815 SUPP.2@2035,3185 SUPP.3 SW1.1 SW1.2 TVS.2 U1.3 U1.5 U1.21 U2.4 U3.1 U3.3 U3.5 U3.7 USB.1@1379,3225 USB.5 USB.SH1 USB.SH2 USB.SH3 USB.SH4 | length 11301.6
  Signal1 w6: v1(-140,1715) -140,1725 -180,1765 -180,2110 ; C8.1 185,2080 185,2060 165,2040 -58.62,2040 -111.61,2092.99 D5.1 -121.96,2092.49 -162.49,2092.49 -180,2110 ; C9.1 190,2320 175,2305 -63.62,2305 -111.61,2352.99 D6.1 -167.99,2352.99 -180,2365 ; C10.1 185,2588 185,2565 175,2555 -64.17,2555 -115.16,2605.98 D7.1 -164.02,2605.98 -180,2590 ; C11.1 195,2835 180,2820 -73.62,2820 -116.61,2862.99 D8.1 -134.45,2855 -165,2855 -180,2840 -180,2590 ; v1(850,2535) 891,2535 928.94,2572.94 928.94,2600.09 IC1.7 ; CD5.2 1557,3307 v1@1560,3310 ; SW1.2 2215.69,2508.26 2264.1,2556.66 2264.1,2567.6 2331.5,2635 C4.1 2346.31,2636.31 2541.86,2636.31 D3.1 ; C7.1@2345,2135 2348,2132 C7.1@2359.37,2120.63 ; C2.2 R15.2 2360.96,3094.04 2395.96,3094.04 v1(2420,3070) ; C3.1 2452,3428 ; v1(2415,2100) 2465,2100 2505,2060 2505,1860 2520.32,1844.68 U3.7 ; v1(2523,3428) 2452,3428 ; D4.1 2558.54,3321.46 2452,3428 ; D3.1@2563.7,2652.99 D3.1@2573.54,2652.99 ; U3.5@2720,1863.59 2718.44,1863.59 2700,1882.03 2700,1970 U2.4@2770,2040 ; C6.1@2736,1536 C6.1 ; C5.1@2743,1670 2780,1670 2795,1685 2795,1775 ; U3.1 2784.37,1785.63 2795,1775 ; U3.3 2785,1825 2795,1815 ; U3.5@2747.39,1863.59 U3.5 2747.24,1865 U3.5@2750,1865 ; U2.4 U2.4@2770,2040 ; -180,2110 -180,2365 ; -180,2365 -180,2590 ; U2.4@2770,2040 2775,2035 2770,2030 v1(2770,1920) 2795,1895 2795,1815 ; 2795,1775 2795,1815
  Signal1 w10: v1(485,2815) 527.24,2772.76 561.48,2772.76 TVS.2 ; CD3.2 637,2410 766.47,2410 828.58,2347.89 828.58,2317.91 IC1.18 ; IC1.21 909.06,2317.91 909.06,2347.89 951.17,2390 978.08,2390 ; IC1.7 932.8,2690.15 914,2708.94 914,2788 CD4.2 900,2808 900,2860 935,2895 FTDI.1 ; IC1.25 1009.52,2316.11 1009.52,2358.56 978.08,2390 ; IC1.26 1035.16,2359.84 1005,2390 ; v1(1060,2390) 1005,2390 ; v1(1085,600) COSC1.1 ; v1(1240,905) 1240,910 1275,945 ; Atmega.1@1286,1720 1286,1666 1260,1640 1260,1578 CD1.1 ; U1.5 1292.07,997.14 1292.07,962.07 1275,945 ; LDO.1 1330,3115 1380,3165 1380,3224 1379,3225 1425,3225 1450,3250 CD5.2 ; CD2.2 CD1.1 ; COSC2.1 v1(1800,605) v1@1805,610 ; SUPP.3 1849.96,2816.04 1851,2815 1851,2811 2002,2660 2135,2660 2173.23,2621.77 SW1.2 SW1.1 2173.23,2214.32 2201.69,2185.86 2205.63,2185.86 2259.49,2132 C7.1@2348,2132 ; C6.1@2743,1555 C5.1@2743,1670 ; 978.08,2390 1005,2390 ; CD1.1 1252,1570 1210,1570 1170,1530 1170,1460 1260.93,1369.07 1260.93,1328.14 U1.21 1265,1324.07 1265,1275 1235,1245 1235,1003.07 U1.3 1233,962 1250,945 1275,945
  Signal1 w20: CD6.2 1731,3086 IC2.1 1785.06,3434.94 2035,3185 SUPP.2@2040,3185
  Signal2 w6: v1(2415,2100) 2415,2135 2382,2168 2382,2217 2399,2234 2399,2996.63 2420,3017.63 v1(2420,3070)
  other v1: 760,2410 1558.5,3308.5
IO_2: J2.3 R17.2 U1.32 | length 3798.8
  Signal1 w6: R17.2 v1(125,1835) ; U1.32 1168.07,1053.07 1185,1070 v1(1187.5,1070)
  Signal1 w10: U1.32 1099,1053.07 895.93,850 895.93,529.07 970,455 1935,455 1960,430 J2.3
  Signal2 w6: v1(125,1835) 250,1710 250,1335 305,1280 720,1280 965,1035 1048.93,1035 1083.93,1070 v1(1187.5,1070)
IO_3: J2.4 U1.1 | length 2006.4
  Signal1 w10: U1.1 1170,950 1147.89,927.89 1002.11,927.89 920,845.79 920,540 975,485 1930,485 1975,530 J2.4
IO_4: J2.5 U1.2 | length 2004.4
  Signal1 w10: U1.2 1201,952.72 1153.28,905 1010,905 940,835 940,550 975,515 1925,515 2045,635 2230,635 J2.5
IO_5: J2.6 U1.9 | length 927.5
  Signal1 w10: U1.9 1606.93,1053.07 1930.86,729.14 1939.14,729.14 1940,730 J2.6
IO_6: J2.7 U1.10 | length 898.2
  Signal1 w10: U1.10 1625.93,1084.07 1880,830 J2.7
IO_7: J2.8 U1.11 | length 870.1
  Signal1 w10: U1.11 1648.93,1116.07 1835,930 J2.8
IO_8: J1.10 U1.12 | length 824.9
  Signal1 w10: U1.12 1672.93,1147.07 1750,1070 J1.10
IO_9: J1.9 R16.1 U1.13 | length 2497.5
  Signal1 w6: v1(2270,2330) 2345,2330 R16.1
  Signal1 w10: U1.13 1695.93,1179.07 1705,1170 J1.9
  Signal2 w6: J1.9 2295,1170 2345,1220 2445.01,1220 2693,1467.99 2693,1768.26 2345,2116.26 2345,2255 v1(2270,2330)
MISO: J1.6 J9.1 U1.16 | length 2744.9
  Signal1 w10: J9.1 1445,230 1915,230 v1(1920,235) ; U1.16 1633.07,1273.07 1830,1470 J1.6
  Signal2 w10: v1(1920,235) 1895,260 1895,1130 J1.6
MOSI: J1.7 J9.5 U1.15 | length 2763.4
  Signal1 w10: J9.5 1310,295 1915,295 v1(1935,315) ; U1.15 1662.07,1242.07 1790,1370 J1.7
  Signal2 w10: v1(1935,315) 1935,1080 2225,1370 J1.7
Net1_2: LDO.2 R11.1 | length 176.5
  Signal1 w10: LDO.2 1336,2945 1380,2945 1424.5,2989.5 1424.5,3013 1441.5,3030 R11.1
Net2_2: R12.2 SUPP.2@1969,2815 | length 131
  Signal1 w10: SUPP.2@1969,2815 R12.2
NetC1_1: C1.1 IC1.2 | length 888
  Signal1 w6: v1(1150,2610) 1157.5,2602.5 1612.5,2602.5 v1(1620,2595)
  Signal1 w10: v1(1060,2670) 1060.75,2669.25 IC1.2 ; v1(1735,2490) 1800,2490 C1.1
  Signal2 w10: v1(1060,2670) 1120,2610 v1(1150,2610) ; v1(1620,2595) 1725,2490 v1(1735,2490)
NetC2_1: C2.1 D2.C R14.1 | length 444
  Signal1 w10: C2.1 R14.1 2350,2830 2485,2830 2550.08,2764.92 D2.C@2680,2764.92
NetCOSC1_2: COSC1.2 R2.2 U1.7 X1.1 | length 546.4
  Signal1 w10: U1.7 1359,924 1255,820 1255,769.02 X1.1 1245.98,665.52 1298,613.5 COSC1.2 R2.2
NetCOSC2_2: COSC2.2 R2.1 U1.8 X1.2 | length 692.6
  Signal1 w10: U1.8 1390,925 1435,880 1570,880 1620,830 X1.2 1635,745 1635,666.5 1587,618.5 COSC2.2 1582,600 R2.1
NetD1_2: Atmega.2 R1.1 | length 170.2
  Signal1 w10: Atmega.2@1404,1720 1410,1714 1410,1670 1460,1620 R1.1
NetD3_2: D3.2 R16.2 | length 263.3
  Signal1 w10: R16.2 2484.69,2443 D3.2@2568.7,2527.01 ; D3.2@2563.7,2527.01 D3.2@2573.54,2527.01
NetD3_4: D3.4 D4.2 | length 608.9
  Signal1 w10: D4.2@2578.54,3112.01 2588.39,3112.01 2639.23,3061.16 2748.84,3061.16 2771.46,3038.54 D3.4@2771.46,2652.99
NetD5_2: D5.2 R17.1 | length 149.2
  Signal1 w6: D5.2 -121.46,1889.96 -80,1848.5 R17.1
NetD5_4: D5.4 D6.2 | length 307.7
  Signal1 w6: D6.2 -121.46,2186.46 -100,2165 55,2165 75,2145 75,2096.54 D5.4
NetD6_4: D6.4 D7.2 | length 305
  Signal1 w6: D7.2 -125,2435 -110,2420 55,2420 70,2405 70,2354.45 D6.4
NetD7_4: D7.4 D8.2 | length 293.5
  Signal1 w6: D8.2 -126.46,2696.46 -100,2670 40,2670 67.91,2642.09 D7.4
NetFTDI1_2: FTDI.2 R8.2 | length 159.7
  Signal1 w10: FTDI.2 1165,2895 1198,2862 R8.2
NetR5_2: R5.2 TX_LED.2 | length 126
  Signal1 w10: TX_LED.2 R5.2@1460,2470
NetR6_2: R6.2 RX_LED.2 | length 132.2
  Signal1 w10: RX_LED.2 1445,2375 R6.2@1460,2360
NetR9_2: R9.2 TVS.6 | length 155.6
  Signal1 w10: R9.2@632,2950 658.01,2923.99 TVS.6
NetR10_1: R10.1 TVS.1 | length 151.7
  Signal1 w10: R10.1 566.48,2933.52 TVS.1
NetR13_2: R13.2 USB.2@1261,3225 | length 116
  Signal1 w10: R13.2 USB.2@1261,3225
RESET: C1.2 J4.3 J9.3 R3.2 SW1.3 SW1.4 U1.29 | length 4920
  Signal1 w10: J4.3 335,1431.25 538.75,1635 v1(730,1635) 730,1827.5 1088.36,2185.86 2024.76,2185.86 2053.23,2214.32 SW1.3 SW1.4 2039.97,2495 C1.2 R3.2 ; U1.29 1047.07,1147.07 v1(985,1085) 760,860 760,555 945,370 1312.5,370 v1(1341.25,341.25)
  Signal2 w10: v1(730,1635) 730,1315 960,1085 v1(985,1085) ; J9.3 1340,340 v1(1341.25,341.25)
RX-I: J2.1 R4.2 U1.30 | length 4645.5
  Signal1 w6: v1(620,1090) 620,1095 790,1265 v1(790,1320) ; R4.2 1470,2680 v1(1500,2650)
  Signal1 w10: U1.30 1113,1111.07 1084.79,1111.07 810,836.28 v1(810,813.75) 810,540 955,395 1925,395 2090,230 J2.1
  Signal2 w6: v1(620,1090) 810,900 v1(810,813.75) ; v1(790,1320) 790,1565 1500,2275 v1(1500,2650)
RXD: IC1.5 R7.1 | length 447
  Signal1 w10: v1(980,2680) 980,2660 983.98,2656.02 IC1.5 ; v1(1230,2725) 1237.65,2732.65 1266.15,2732.65 1300,2766.5 R7.1
  Signal2 w10: v1(980,2680) 1025,2725 v1(1230,2725)
RXLED: IC1.22 RX_LED.1 | length 469
  Signal1 w10: IC1.22 932.8,2257.2 960,2230 1125,2230 1165,2270 1165,2365 1175,2375 RX_LED.1
SCK: J1.5 J9.2 R1.2 U1.17 | length 2999
  Signal1 w10: U1.17 1390,1370 1410,1390 1435,1390 1460,1415 R1.2 1755,1455 1870,1570 J1.5
  Signal2 w10: J9.2 1830,125 1865,160 1865,1200 J1.5
SS: J1.8 U1.14 | length 817.8
  Signal1 w10: U1.14 1685.07,1210.07 1745,1270 J1.8
SUPP: PWR_SW.1 R12.1 SUPP.1@2035,2950 | length 1172
  Signal1 w20: SUPP.1@2035,2950 2049.25,2935.75 2110.75,2935.75 2218,2828.5 R12.1
  Signal2 w20: PWR_SW.1 1509.3,3155.7 1614.3,3155.7 1825,2945 2030,2945 SUPP.1@2035,2950
Temp_Vout_1: U2.1 U3.4 | length 303.9
  Signal1 w6: U2.1 2620,2035 2684,1971 2684,1873.76 2712.29,1845.46 2745.83,1845.46 U3.4
  Signal1 w10: U2.1 U2.1@2626,2062
TX-O: J2.2 R7.2 U1.31 | length 4820.7
  Signal1 w6: v1(620,1010) 620,1025 860,1265 v1(860,1275) ; R7.2 1490,2780 v1(1505,2765) v1@1510,2760
  Signal1 w10: U1.31 1113,1079.07 1083.79,1079.07 855,850.28 v1(855,700) 855,535 965,425 1935,425 2035,325 2230,325 J2.2
  Signal2 w6: v1(620,1010) 620,925 845,700 v1(855,700) ; v1(860,1275) 860,1585 1555,2280 1555,2715 v1(1505,2765)
TXD: IC1.1 R4.1 | length 259.3
  Signal1 w10: IC1.1 1086.34,2624.59 1141.75,2680 R4.1
TXLED: IC1.23 TX_LED.1 | length 488.8
  Signal1 w10: IC1.23 958.39,2271.61 975,2255 1115,2255 1140,2280 1140,2435 1175,2470 TX_LED.1
USB_SUPP: FUSE.2 PWR_SW.3 R13.1 TVS.5 | length 992.8
  Signal1 w20: TVS.5 686.54,2767.76 885,2966.22 885,3069.5 1027,3211.5 R13.1 1027,3312 PWR_SW.3 916.77,3375 FUSE.2
USB_VCC: FUSE.1 USB.1@647.99,3115 | length 391.5
  Signal1 w20: USB.1@647.99,3115 702.99,3060 800,3060 905,3165 FUSE.1
VCC: C3.2 C4.2 C5.2 C6.2 C7.2 C8.2 C9.2 C10.2 C11.2 CD2.1 CD3.1 D3.3 D4.3 D5.3 D6.3 D7.3 D8.3 IC1.20 J4.2 J4.5 J9.4 R3.1 R5.1 R6.1 R14.2 R18.2 R19.2 U1.4 U1.6 U1.18 U2.5 U2.8 U3.8 VCC_SW.3 | length 16102.2
  Signal1 w10: U3.8 2650,1825 2670,1805 2670,1715 2625,1670 C6.2@2625,1550
  Signal1 w15: 881.61,2242.97 IC1.20 881.61,2438.39
  Signal1 w20: D7.3 77.76,2480 D7.3@80.26,2477.5 ; D5.3 D5.3@81.3,1967.01 ; D6.3 D6.3@81.3,2227.01 ; C8.2 D5.3@81.3,1967 ; C9.2 D6.3@81.3,2227 ; C10.2 187.5,2477.5 D7.3@80.26,2477.5 ; C11.2 193.5,2738.5 67.95,2738.5 D8.3 76.3,2737.01 135.81,2677.5 257.5,2677.5 310,2625 310,2360 ; J4.5 327.35,1237.65 282.35,1237.65 265,1255 265,1475 ; J4.2 324.18,1530 288.24,1494.06 284.06,1494.06 265,1475 ; CD3.1 680,2485 835,2485 ; CD3.1@626.75,2551.75 620,2558.5 620,2565 755,2700 755,2766.42 970,2981.42 VCC_SW.3 ; 881.61,2242.97 605.64,1967 382,1967 310,1895 ; 881.61,2438.39 835,2485 ; U1.4 1264,1104 1359,1199 ; U1.6 1327,1068.88 1359,1100.88 1359,1199 ; CD2.1 1359,1451 U1.18 1359,1199 ; R5.1@1570,2483.5 1528,2525.5 1184.22,2525.5 1143.72,2485 835,2485 ; R18.2 1693.5,2271.5 1693.5,2373.5 R19.2 R6.1 R5.1 1690,2590 R3.1 1805,2603.5 1876.5,2675 v1(1895,2675) ; v1(2250,2255) 2255,2250 C7.2 2545,2250 2621,2326 ; v1(2250,2645) 2250,2653.12 2283.28,2686.4 2283.28,2703.28 2297,2717 R14.2 ; C4.2 2358.5,2517 2431.5,2590 2678.62,2590 2741.61,2527.01 D3.3 ; C3.2 2440,3310 2490,3260 2490,3205 2520,3175 2710,3175 2745,3140 2745,3118.46 D4.3 ; U2.8 2621,2263 2621,2326 ; v1(2625,1470) C6.2@2625,1550 ; D4.3@2754.69,3112.01 2766.3,3112.01 2800.98,3077.32 2800.98,2556.54 2771,2526.55 2771,2455 ; U2.5 2771,2263 2771,2455 ; D7.3@80.26,2477.5 147.76,2410 260,2410 310,2360 ; D5.3@81.3,1967 148.31,1900 250,1900 265,1885 265,1850 ; D6.3@81.3,2227 148.31,2160 260,2160 310,2110 ; 265,1475 265,1850 ; 265,1850 310,1895 ; 310,1895 310,2110 ; 310,2110 310,2360 ; 2621,2326 2750,2455 2771,2455
  Signal2 w20: J4.5 520,1045 520,725 1185,60 1275,60 J9.4 ; v1(1360,1110) 1355,1115 1135,1115 940,1310 940,1575 1895,2530 v1(1895,2675) 2211.88,2675 2241.88,2645 v1(2250,2645) 2250,2636.88 2200,2586.88 2200,2313.12 2250,2263.12 v1(2250,2255) 2250,2170.71 2625,1795.71 v1(2625,1470)
VIN: CD5.1 IC2.3 J4.8 PWR_SW.2 VCC_SW.1 VCC_SW.2 | length 3372.2
  Signal1 w20: J4.8 615,1210 615,1580 v1(620,1585) ; VCC_SW.2 VCC_SW.2@1085,3075 ; VCC_SW.1 VCC_SW.1@1170,3072.17 ; PWR_SW.2 1255,3440 1435,3440 CD5.1 1456.5,3431.5 1549,3431.5 IC2.3
  Signal2 w20: v1(620,1585) 620,2467.43 1070,2917.43 VCC_SW.2 VCC_SW.1 1070,3160 1070,3255 PWR_SW.2
pads on no net: D4.4 D8.4 IC1.3 IC1.6 IC1.8 IC1.9 IC1.10 IC1.11 IC1.12 IC1.13 IC1.14 IC1.24 IC1.27 IC1.28 U1.19 U1.22 U2.2 U2.3 U2.6 U2.7 U3.2 USB.4

## Polygon pours and split planes (outlines as drawn)
GND on GND1 "GND1" (solid, pour order 0): 80,3530 -245,3205 -245,1660 -5,1420 0,1420 0,0 2570,0 2570,1240 2850,1520 2850,3295 2615,3530
no net on GND1 "GND1-No Net" (solid, pour order 2): -15,3360
GND on GND2 "GND2" (solid, pour order 4): 100,3515 -225,3190 -225,1665 15,1425 15,0 2555,0 2555,1230 2845,1520 2845,3285 2615,3515

## Keep-outs
Keep-Out Layer:
  lines w40: -225,1665 -225,3200 90,3515 100,3515 2615,3515 2845,3285 2845,1520 2555,1230 2555,20 15,20 15,1425 -225,1665

## Silkscreen, mask and mechanical layers (free items; w line width, h text height)
Top Overlay:
  drawing of 161 lines, arcs and shapes, not listed
  text "HEART BEAT SENSOR" at 2515,2530 h40 r90
  text "TEMP SENSOR" at 2520,2005 h40 r90
  text "CHINMAY PATIL & SHUBHAM BHOSALE" at 375,1865 h33 r90
  text "CU BOULDER || ECEN 5013" at 445,1865 h33 r90
  text "GND" at 400,1610 h30
  text "POWER" at 590,1350 h30 r270
  text "GND" at 40,910 h30
  text "GND" at 2440,910 h30
  text "DIGITAL PWM ~" at 1980,855 h30 r90
  text "ANALOG IN" at 590,700 h30 r270
  text "RX-I" at 2055,225 h30
Drill Guide:
  lines w10: 2855,1545 2855,2330
Mechanical 16:
  lines w10: -245,-775 -245,3945 ; 0,-230 0,1420 ; 0,3535 3185,3535 ; 10,0 3300,0 ; 2570,-255 2570,1242.5 ; 2855,-785 2855,3840

## Dimensions
-245,-960 to 2855,-965 on Mechanical 16
-10,0 to 0,3535 on Mechanical 16
0,-230 to 2570,-5 on Mechanical 16

## Text inside footprints (layer, text, board x,y; h text height)
J1: Top Overlay "AD5/SCL" at 1960,1960 h30; Top Overlay "AD4/SDA" at 1955,1885 h30; Top Overlay "AREF" at 2050,1780 h30; Top Overlay "GND" at 2070,1670 h30; Top Overlay "SCK" at 2070,1580 h30; Top Overlay "MISO" at 2050,1485 h30; Top Overlay "MOSI" at 2050,1385 h30; Top Overlay "SS" at 2075,1285 h30; Top Overlay "IO_9" at 2050,1185 h30; Top Overlay "IO_8" at 2045,1090 h30
J2: Top Overlay "TX-O" at 2045,340 h30; Top Overlay "IO_2" at 2045,445 h30; Top Overlay "IO_3" at 2045,545 h30; Top Overlay "IO_4" at 2045,650 h30; Top Overlay "IO_5" at 2045,745 h30; Top Overlay "IO_6" at 2045,845 h30; Top Overlay "IO_7" at 2045,945 h30
J3: Top Overlay "AD0" at 405,740 h30; Top Overlay "AD1" at 405,640 h30; Top Overlay "AD2" at 405,540 h30; Top Overlay "AD3" at 405,440 h30; Top Overlay "AD5" at 405,240 h30; Top Overlay "AD4" at 405,340 h30
J4: Top Overlay "VCC" at 400,1510 h30; Top Overlay "RESET" at 400,1415 h30; Top Overlay "3.3V" at 400,1310 h30; Top Overlay "VCC" at 400,1215 h30; Top Overlay "GND" at 405,1110 h30; Top Overlay "GND" at 405,1015 h30; Top Overlay "VIN" at 405,905 h30
J5: Top Overlay "GND" at 2445,1925 h30; Top Overlay "GND" at 2445,1850 h30; Top Overlay "GND" at 2445,1750 h30; Top Overlay "GND" at 2445,1655 h30; Top Overlay "GND" at 2445,1555 h30; Top Overlay "GND" at 2445,1455 h30; Top Overlay "GND" at 2445,1355 h30; Top Overlay "GND" at 2445,1255 h30; Top Overlay "GND" at 2445,1155 h30; Top Overlay "GND" at 2445,1055 h30
J6: Top Overlay "GND" at 2440,215 h30; Top Overlay "GND" at 2440,315 h30; Top Overlay "GND" at 2440,410 h30; Top Overlay "GND" at 2440,515 h30; Top Overlay "GND" at 2440,615 h30; Top Overlay "GND" at 2440,715 h30; Top Overlay "GND" at 2440,815 h30
J7: Top Overlay "GND" at 35,1605 h30; Top Overlay "GND" at 35,1505 h30; Top Overlay "GND" at 40,1410 h30; Top Overlay "GND" at 40,1320 h30; Top Overlay "GND" at 40,1215 h30; Top Overlay "GND" at 40,1115 h30; Top Overlay "GND" at 40,1015 h30
J8: Top Overlay "GND" at 40,720 h30; Top Overlay "GND" at 40,620 h30; Top Overlay "GND" at 40,515 h30; Top Overlay "GND" at 40,415 h30; Top Overlay "GND" at 40,210 h30; Top Overlay "GND" at 40,315 h30